# Altium PCB STEVAL-ESLWB0CB.PcbDoc (part 2 of 3)
Units mm, origin at the board's own origin, x right, y up, seen from the top; angles counter-clockwise.
Board outline 45.59 x 31.82 mm, 4 copper layers (Top Layer, Mid Layer 1, Mid Layer 2, Bottom Layer), stack 0.886 mm thick; 85 components, 64 nets, 270 pads, 388 vias.
Unrouted connection lines stored in the file: 146.
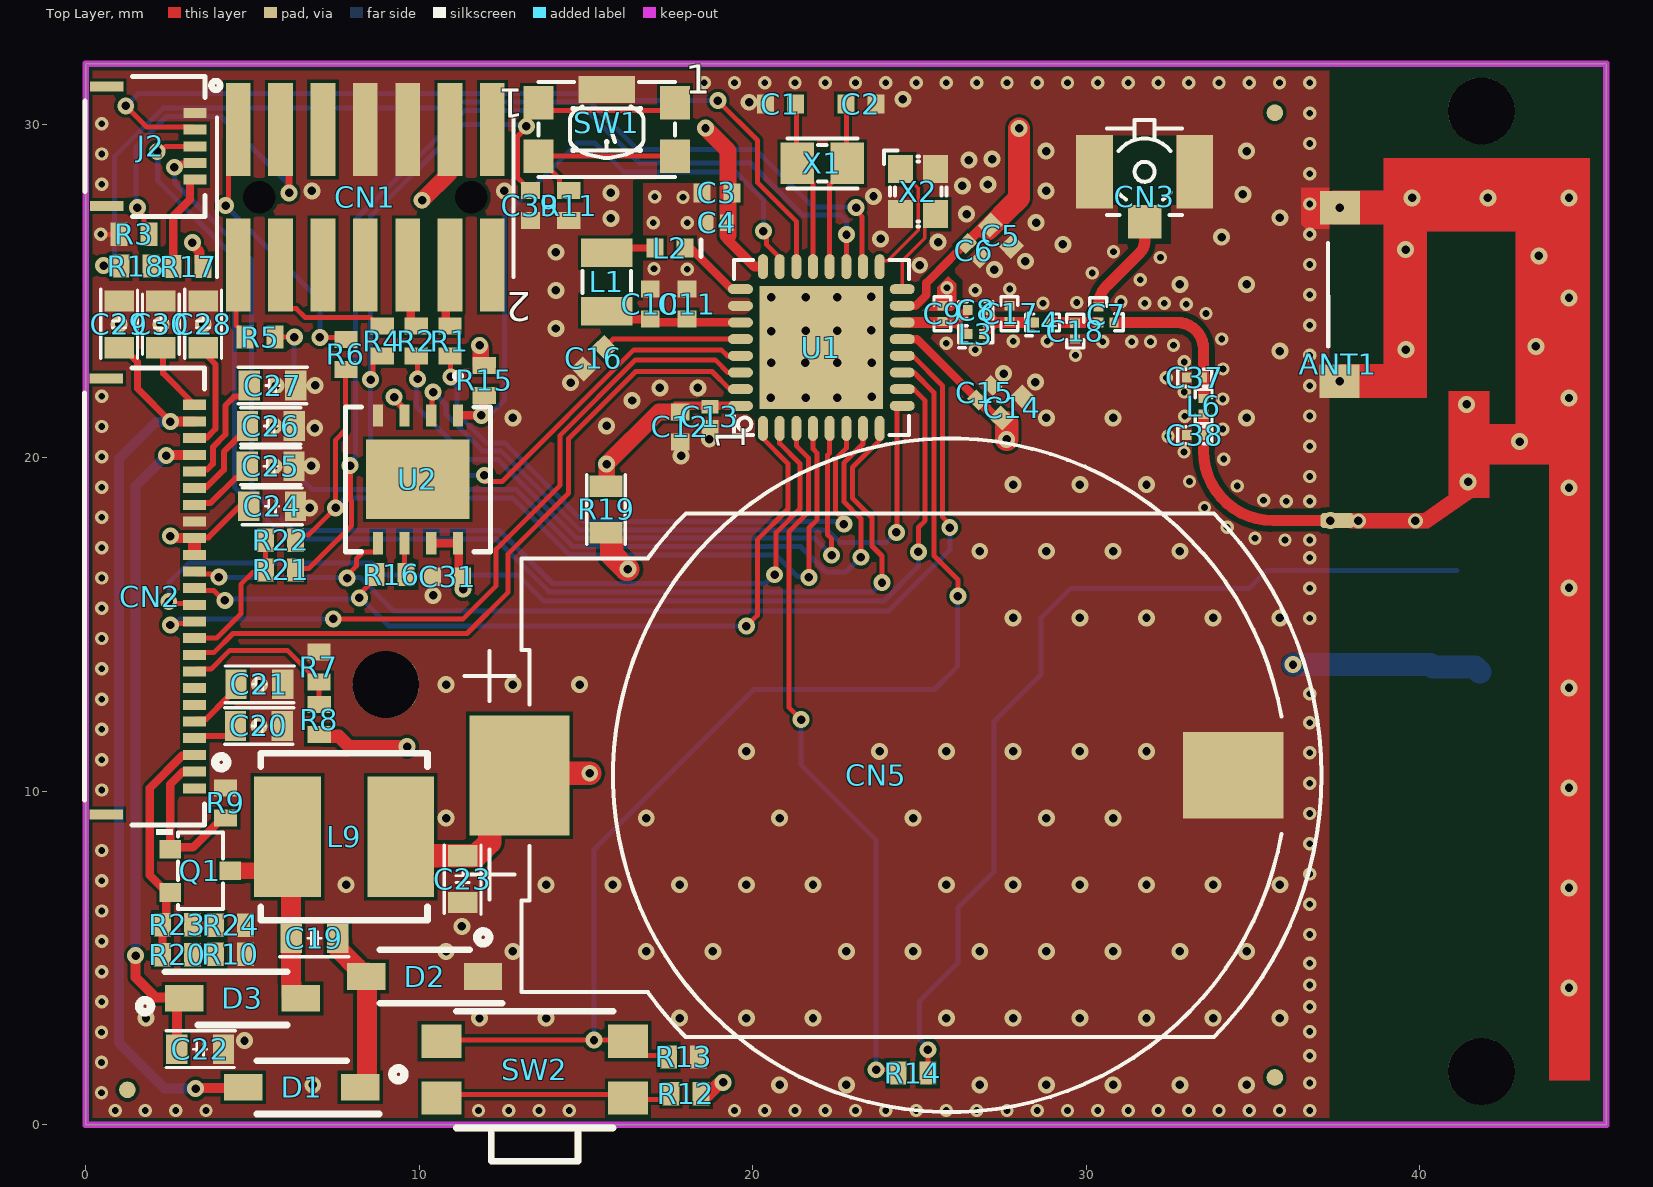
[diagram p0: Top Layer view]

## Part data (continued)
R8 R9 R15: library part MCD-02551, "Resistor, 10K, 0402, +/-0.1%, 1/16W, +/-25ppm/°C", Manufacturer=YAGEO, Manufacturer Part Number=RT0402BRD0710KL, Package=0402, ComponentLink1URL=http://tunmcdsvn.tun.st.com/Component_Documentation_Library/Trunk/Resistor/YAGEO_RT_Series, ID=4657, Internal_Part_Number=MCD-02551, Manufacturer_Part_Number=RT0402BRD0710KL, Order_Code_Digikey=YAG1346TR-ND, Order_Code_Farnell=3496450RL, Order_Code_RS=1991270, Part_Preference=Recommended, Part_Type=Resistor, ShowFields=YES, Status=Checked
R11 R12: library part MCD-02655, "Resistor, 100R, 0402, +/-0.1%, 1/16W, +/-25ppm/°C", Manufacturer=YAGEO, Manufacturer Part Number=RT0402BRD07100RL, Package=0402, Component_Country_Of_Origin=China, ComponentLink1URL=http://tunmcdsvn.tun.st.com/Component_Documentation_Library/Trunk/Resistor/YAGEO_RT_Series, ID=4761, Internal_Part_Number=MCD-02655, Manufacturer_Part_Number=RT0402BRD07100RL, Order_Code_Digikey=YAG2301TR-ND, Order_Code_Farnell=3496479RL, Order_Code_RS=199-1268, Part_Preference=Recommended, Part_Type=Resistor, ShowFields=YES, Status=Checked
R13: library part MCD-00059, "Resistor, 100K, 0402, +/-1%, 1/16W", Manufacturer=YAGEO, Manufacturer Part Number=RC0402FR-07100KL, Package=0402, Component_Country_Of_Origin=China, ComponentLink1URL=http://tunmcdsvn.tun.st.com/Component_Documentation_Library/Trunk/Resistor/YAGEO_RC_L_Series, ID=2533, Internal_Part_Number=MCD-00059, Manufacturer_Part_Number=RC0402FR-07100KL, Order_Code_Digikey=311-100KLRTR-ND, Order_Code_Farnell=2421891, Order_Code_RS=2421891, Part_Preference=Recommended, Part_Type=Resistor, Partial_Alternate_Internal_Part_Number=MCD-03301, ShowFields=YES, Status=Released
R14: library part MCD-01819, "SMD Chip Resistor, 750 Ohm", Manufacturer=YAGEO, Manufacturer Part Number=RC0402DR-07100RL, Package=0402, Component_Country_Of_Origin=China, ComponentLink1URL=http://tunmcdsvn.tun.st.com/Component_Documentation_Library/Trunk/Resistor/YAGEO_RC_L_Series, ID=3919, Internal_Part_Number=MCD-01819, Manufacturer_Part_Number=RC0402DR-07100RL, Order_Code_Digikey=RC0402DR-07100RL-ND, Order_Code_Farnell=N/A, Order_Code_RS=N/A, Part_Preference=Recommended, Part_Type=Resistor, ShowFields=YES, Status=Released
R16: library part MCD-00189, "Resistor, 22R, 0402, +/-1%, 1/16W", Manufacturer=YAGEO, Manufacturer Part Number=RC0402FR-0722RL, Package=0402, Component_Country_Of_Origin=China, ComponentLink1URL=http://tunmcdsvn.tun.st.com/Component_Documentation_Library/Trunk/Resistor/YAGEO_RC_L_Series, ID=2677, Internal_Part_Number=MCD-00189, Manufacturer_Part_Number=RC0402FR-0722RL, Order_Code_Digikey=311-22.0LRCT-ND, Order_Code_Farnell=9239030, Order_Code_RS=N/A, Part_Preference=Recommended, Part_Type=Resistor, ShowFields=YES, Status=Released
R19: library part MCD-00181, "Resistor, 0R, 0603, +/- 0.5mR, 1/4W", Manufacturer="ROHM SEMICONDUCTOR", Manufacturer Part Number=PMR03EZPJ000, Package=0603, Component_Country_Of_Origin="Philippines, Thailand", ComponentLink1URL=http://tunmcdsvn.tun.st.com/Component_Documentation_Library/Trunk/Resistor/ROHM_PMR_Series, ID=2691, Internal_Part_Number=MCD-00181, Manufacturer_Part_Number=PMR03EZPJ000, Order_Code_Digikey=PMR03EZPJ000-ND, Order_Code_Farnell=N/A, Order_Code_RS=N/A, Part_Preference=Recommended, Part_Type=Resistor, ShowFields=YES, Status=Released
R24: library part MCD-02517, "Resistor, 0R47, 0402, +/-1%, 1/16W", Manufacturer=YAGEO, Manufacturer Part Number=RL0402FR-070R47L, Package=0402, Component_Country_Of_Origin=China, ComponentLink1URL=http://tunmcdsvn.tun.st.com/Component_Documentation_Library/Trunk/Resistor/YAGEO_RL_Series, ID=4623, Internal_Part_Number=MCD-02517, Manufacturer_Part_Number=RL0402FR-070R47L, Order_Code_Digikey=311-.47PTR-ND, Order_Code_Farnell=N/A, Order_Code_RS=N/A, Part_Preference=Recommended, Part_Type=Resistor, ShowFields=YES, Status=Checked
SW1: library part MCD-00715, "Switch tactile, SPST-NO, 32V, 50mA, 2.8x4.6mm", Manufacturer=C&K, Manufacturer Part Number=Y78B23110FP, Package=2.8x4.6mm, Component_Country_Of_Origin=France, ComponentLink1URL=http://tunmcdsvn.tun.st.com/Component_Documentation_Library/Trunk/Misc/C&K_Y78B23110FP, ID=3028, Internal_Part_Number=MCD-00715, Manufacturer_Part_Number=Y78B23110FP, Order_Code_Digikey=401-1429-2-ND, Order_Code_Farnell=N/A, Order_Code_RS=N/A, Part_Preference=Recommended, Part_Type=Misc, ShowFields=YES, Status=Checked
SW2: "WS-TASU SMT Tact Switch 4.7x3.5mm side push, SPST-NO, 12VDC, 50mA, 160g", Manufacturer="Wurth Elektronik", Operating Temperature Max=85°C, Operating Temperature Min=-40°C, Rated Current=50mA, Rated Voltage=12VDC, Category="Tact Switches", Circuit=SPST-NO, ComponentLink1Description="Website Link", ComponentLink1URL=https://www.we-online.com/redexpert/article/434351045816?ad, ComponentLink2Description="Datasheet Link", ComponentLink2URL=https://www.we-online.com/redexpert/spec/434351045816?ad, Contact Material="Stainless Steel", Contact Plating=Silver, Height=1.65mm, Length=4.7mm, Manufacturer Part Number=434351045816, Match Code=WS-TASU, Mount="Surface Mount", Operation Force=160g, Packaging="Tape and Reel", Terminal Material="Copper Alloy", Terminal Plating=Silver, Washable=No, Width=3.5mm
U1: library part MCD-03444, "Bluetooth® Low Energy wireless SoC", Manufacturer=STMICROELECTRONICS, Package=QFN32, Component_Country_Of_Origin=Unknown, ComponentLink1URL=http://tunmcdsvn.tun.st.com/Component_Documentation_Library/Trunk/IC/STMICROELECTRONICS_BLUENRG-372AC, ID=5560, Internal_Part_Number=MCD-03444, Manufacturer Part Number=STM32WB09, Manufacturer_Part_Number=STM32WB09, Order_Code_Digikey=N/A, Order_Code_Farnell=N/A, Order_Code_RS=N/A, Part_Preference=Recommended, Part_Type=IC, ShowFields=YES, Status=Checked
U2: library part "W25Q64JVXGIQ TR", "No Description Available", Manufacturer=Winbond, Copyright="Copyright (C) 2023 Ultra Librarian. All rights reserved.", Digi-Key_Part_Number_1=256-W25Q64JVXGIQTR-ND, Manufacturer Part Number="W25Q64JVXGIQ TR", Manufacturer_Part_Number="W25Q64JVXGIQ TR", Mfr_Name=Winbond, RefDes=RefDes, Type=DEV
X1: library part MCD-01445, "Crystal, 32.768kHz, 7pF, +/-20ppm, 80K, 2.05x1.2mm", Manufacturer=NDK, Manufacturer Part Number=NX2012SA-32.768KHZ-EXS00A-MU00389, Package=2.05x1.2mm, BMS_Part_Number=9157043, Component_Country_Of_Origin=Unknown, ComponentLink1URL=http://tunmcdsvn.tun.st.com/Component_Documentation_Library/Trunk/Crytal_Oscillator/NDK_NX2012SA_Series, ID=3545, Internal_Part_Number=MCD-01445, Manufacturer_Part_Number=NX2012SA-32.768KHZ-EXS00A-MU00389, Order_Code_Digikey=644-1350, Order_Code_Farnell=N/A, Order_Code_RS=N/A, Part_Preference=Recommended, Part_Type=Crystal_Osc, ShowFields=YES, Status=Checked
X2: library part MCD-01446, "Crystal, 32MHz, 8pF, +/-10ppm, 60R, 2x1.6mm", Manufacturer=NDK, Manufacturer Part Number=NX2016SA-32MHZ-EXS00A-CS06654, Package=2x1.6mm, BMS_Part_Number=9157042, Component_Country_Of_Origin=Unknown, ComponentLink1URL=http://tunmcdsvn.tun.st.com/Component_Documentation_Library/Trunk/Crytal_Oscillator/NDK_NX2016SA_Series, ID=3546, Internal_Part_Number=MCD-01446, Manufacturer_Part_Number=NX2016SA-32MHZ-EXS00A-CS06654, Order_Code_Digikey=644-1373, Order_Code_Farnell=N/A, Order_Code_RS=N/A, Part_Preference=Recommended, Part_Type=Crystal_Osc, ShowFields=YES, Status=Checked

## Free pads (board coordinates)
  round 0.5 smd far side mask+0: 1(1.25,1.05) 1(35.655,1.423) 1(35.655,30.35)
  round 0.5 smd mask+0: 1(1.25,1.05) 1(35.655,1.423) 1(35.655,1.423) 1(35.655,30.35) 1(35.655,30.35)
  round 2 hole 2: 13(9,13.204) 13(41.85,1.604) 13(41.85,30.404)

## Via types
v1: diameter 0.508, hole 0.254, Top Layer to Bottom Layer, tented both sides, 209 vias
v2: diameter 0.4, hole 0.2, Top Layer to Bottom Layer, tented both sides, 157 vias
v3: diameter 0.508, hole 0.254, Top Layer to Bottom Layer, 20 vias
v4: diameter 0.45, hole 0.254, Top Layer to Bottom Layer, 2 vias

## Nets (pads, with @x,y where several pads share a name; then routed paths per layer and width w, separated by ;. In a path a pad name is that pad's centre, name@x,y a point inside that pad or via, vN(x,y) a via of type N, cw(c..) or ccw(c..) an arc to the next point about the centre after c; other vN are vias at no path point)
BS: CN2.8 R7.1 R8.2 | length 5.1
  Top Layer w0.15: CN2.8@3.262,13.594 3.337,13.669 3.759,13.669 4.318,14.228 6.045,14.228 6.719,13.554 6.719,13.459 6.899,13.279 R7.1@6.994,13.279 6.994,12.66 R8.2@7.05,12.604
BUSY: CN2.9 U1.31 | length 21.7
  Top Layer w0.15: CN2.9@3.262,14.094 3.337,14.169 3.851,14.169 4.418,14.736 11.43,14.736 12.665,15.971 12.665,17.126 14.478,18.938 14.478,20.578 16.49,22.59 18.779,22.59 19.309,22.06 U1.31@19.625,22.06
CS: CN2.12 U1.10 | length 30.9
  Top Layer w0.15: v1(2.489,15.688) 2.537,15.641 3.215,15.641 CN2.12@3.262,15.594 ; U1.10@24.485,22.06 24.828,22.06 25.172,21.716 25.172,18.748 25.172,18.117 24.967,17.911 v1(24.967,17.182)
  Bottom Layer w0.15: v1(2.489,15.688) 2.489,16.256 3.085,16.852 8.587,16.852 8.947,16.492 12.957,16.492 13.736,15.712 23.935,15.712 24.967,16.744 v1(24.967,17.182)
D/C: CN2.11 U1.30 | length 22.8
  Top Layer w0.15: v1(2.54,14.99) 2.592,15.042 3.21,15.042 CN2.11@3.262,15.094 ; v1(7.421,15.174) 11.317,15.174 12.305,16.162 12.305,17.262 14.224,19.181 14.224,20.678 16.487,22.94 18.873,22.94 19.254,22.56 U1.30@19.625,22.56
  Bottom Layer w0.15: v1(2.54,14.99) 2.637,14.99 2.821,15.174 v1(7.421,15.174)
GDR: CN2.2 Q1.1 R9.2 | length 5
  Top Layer w0.25: CN2.2@3.262,10.594 2.912,10.594 2.536,10.218 2.536,8.168 2.691,8.323 3.213,8.323 4.096,9.206 R9.2@4.191,9.206
GND: ANT1.2 C1.2 C2.1 C3.1 C4.1 C5.1 C6.1 C9.1 C10.1 C11.1 C12.1 C13.1 C14.1 C15.1 C16.1 C17.1 C18.1 C20.1 C21.1 C22.1 C23.1 C24.1 C25.1 C26.1 C27.1 C28.1 C29.1 C30.1 C31.1 C37.1 C38.1 C39.1 CN1.5 CN1.7 CN2.17 CN3.2 CN3.3 CN5.2 D2.1 J2.1 pad.13@9,13.204 R3.1 R7.2 R9.1 R10.1 R11.1 R13.1 R24.2 SW1.5 U1.26 U1.33 U2.4 X2.2 X2.4 | length 1.5
  Top Layer w0.15: v2(0.45,26.704) R3.1@1,26.704
  Top Layer w0.34: v2(36.703,27.614) ccw(c36.812,27.614) 36.812,27.505 ANT1.2@37.6,27.505
  other v1: 6.807,1.202 20.807,1.202 22.807,1.202 26.807,1.202 28.807,1.202 30.807,1.202 32.807,1.202 34.807,1.202 4.76,2.525 1.807,3.202 11.807,3.202 13.807,3.202 17.807,3.202 19.807,3.202 21.807,3.202 25.807,3.202 27.807,3.202 29.807,3.202 31.807,3.202 33.807,3.202 35.807,3.202 10.807,5.202 12.807,5.202 16.807,5.202 18.807,5.202 22.807,5.202 24.807,5.202 26.807,5.202 28.807,5.202 30.807,5.202 32.807,5.202 34.807,5.202 11.281,5.954 7.807,7.202 13.807,7.202 15.807,7.202 17.807,7.202 19.807,7.202 21.807,7.202 25.807,7.202 27.807,7.202 29.807,7.202 31.807,7.202 33.807,7.202 35.807,7.202 10.807,9.202 16.807,9.202 20.807,9.202 24.807,9.202 28.807,9.202 30.807,9.202 19.807,11.202 23.807,11.202 25.807,11.202 27.807,11.202 29.807,11.202 31.807,11.202 5.192,11.962 10.807,13.202 12.807,13.202 14.807,13.202 5.207,13.212 27.807,15.202 29.807,15.202 31.807,15.202 33.807,15.202 35.807,15.202 10.414,15.879 26.807,17.202 28.807,17.202 30.807,17.202 32.807,17.202 6.713,18.504 27.807,19.202 29.807,19.202 31.807,19.202 5.645,19.75 6.764,19.761 17.852,20.062 18.696,20.561 6.866,20.894 5.651,20.955 15.621,20.959 12.807,21.202 28.807,21.202 30.807,21.202 34.807,21.202 16.383,21.721 20.542,21.808 21.591,21.802 22.536,21.808 23.565,21.83 17.214,22.099 18.357,22.099 5.702,22.17 6.875,22.172 14.538,22.253 28.475,22.273 27.521,22.53 20.557,22.859 21.581,22.859 22.536,22.859 23.565,22.859 35.807,23.202 20.55,23.803 21.591,23.817 22.536,23.818 23.555,23.824 14.097,23.88 1,24.004 2.25,24.004 3.522,24.004 20.555,24.812 21.591,24.818 22.536,24.818 23.555,24.828 14.097,25.023 32.807,25.202 34.807,25.202 27.249,25.643 25.008,25.777 28.176,25.897 14.097,26.166 29.3,26.404 25.561,26.472 23.836,26.57 34.06,26.62 28.5,27.054 15.748,27.182 35.807,27.202 26.416,27.309 23.621,27.844 34.7,27.904 15.748,27.944 6.778,28.006 12.55,28.004 28.8,28.004 26.286,28.157 27.051,28.198 26.481,28.931 27.178,28.96 28.8,29.202 34.807,29.202 19.891,30.664 24.5,30.754
  other v2: 0.88,0.433 1.788,0.433 2.696,0.433 3.604,0.433 11.776,0.433 12.684,0.433 13.592,0.433 14.5,0.433 19.451,0.433 20.359,0.433 21.267,0.433 22.175,0.433 23.083,0.433 23.991,0.433 24.899,0.433 25.807,0.433 26.715,0.433 27.623,0.433 28.531,0.433 29.439,0.433 30.347,0.433 31.255,0.433 32.163,0.433 33.071,0.433 33.979,0.433 34.887,0.433 35.795,0.433 36.703,0.433 0.47,0.966 36.703,1.254 0.473,1.873 36.703,2.075 0.473,2.781 36.703,2.798 36.703,3.545 0.476,3.689 36.703,4.195 0.476,4.597 36.703,4.845 0.478,5.505 36.703,5.707 0.478,6.413 36.703,6.615 0.481,7.32 36.703,7.523 0.481,8.228 36.703,8.431 36.703,9.339 0.481,10.044 36.703,10.247 0.481,10.952 36.703,11.155 0.481,11.86 36.703,12.063 0.481,12.768 36.703,12.929 0.481,13.676 0.481,14.584 36.703,15.188 0.481,15.492 36.703,16.096 0.481,16.4 36.703,17.004 0.481,17.308 35.959,17.54 36.703,17.54 35.06,17.592 34.223,17.923 0.481,18.216 33.545,18.514 36,18.704 36.703,18.704 35.318,18.732 0.481,19.124 34.526,19.16 33.095,19.293 36.703,19.442 34.123,19.965 0.481,20.032 32.931,20.178 36.703,20.35 32.45,20.654 34.098,20.864 0.481,20.94 32.95,21.254 36.703,21.258 34.098,21.764 0.481,21.848 32.939,21.978 36.703,22.166 32.4,22.404 34.099,22.664 32.937,22.878 29.677,23.075 36.703,23.074 26.67,23.245 32.616,23.383 25.807,23.437 30.5,23.479 31.367,23.479 31.927,23.479 27.813,23.499 28.829,23.499 34.068,23.564 36.703,23.982 33.593,24.328 33,24.604 28.702,24.642 31.75,24.642 32.34,24.641 29.716,24.661 31.044,24.679 36.703,24.89 26.67,25.023 27.705,25.064 25.825,25.097 31.622,25.343 30.179,25.546 17.041,25.675 18.034,25.658 36.703,25.798 32.224,26.011 30.816,26.181 36.703,26.706 17.018,27.055 18.034,27.055 17.064,27.828 17.907,27.817 0.481,28.204 36.703,28.522 0.481,29.112 36.703,29.43 0.481,30.02 36.703,30.338 18.543,31.246 19.451,31.246 20.359,31.246 21.267,31.246 22.175,31.246 23.083,31.246 23.991,31.246 24.899,31.246 25.807,31.246 26.715,31.246 27.623,31.246 28.531,31.246 29.439,31.246 30.347,31.246 31.255,31.246 32.163,31.246 33.071,31.246 33.979,31.246 34.887,31.246 35.795,31.246 36.703,31.246
GPO: J2.4 U1.2 | length 33.2
  Top Layer w0.15: v1(2.655,28.716) 2.752,28.716 2.877,28.841 J2.4@3.278,28.841 ; v1(20.653,16.496) 20.701,16.544 20.701,17.757 21.416,18.471 21.416,19.826 20.805,20.437 U1.2@20.805,20.88
  Bottom Layer w0.15: v1(2.655,28.716) 2.661,28.71 2.661,28.256 4.976,25.942 4.976,19.053 6.204,17.825 12.408,17.825 13.998,16.235 20.372,16.235 20.633,16.496 v1(20.653,16.496)